# EAGLE board EIB36-JAE_MC-Av1_panelization (EAGLE 9.2.2)
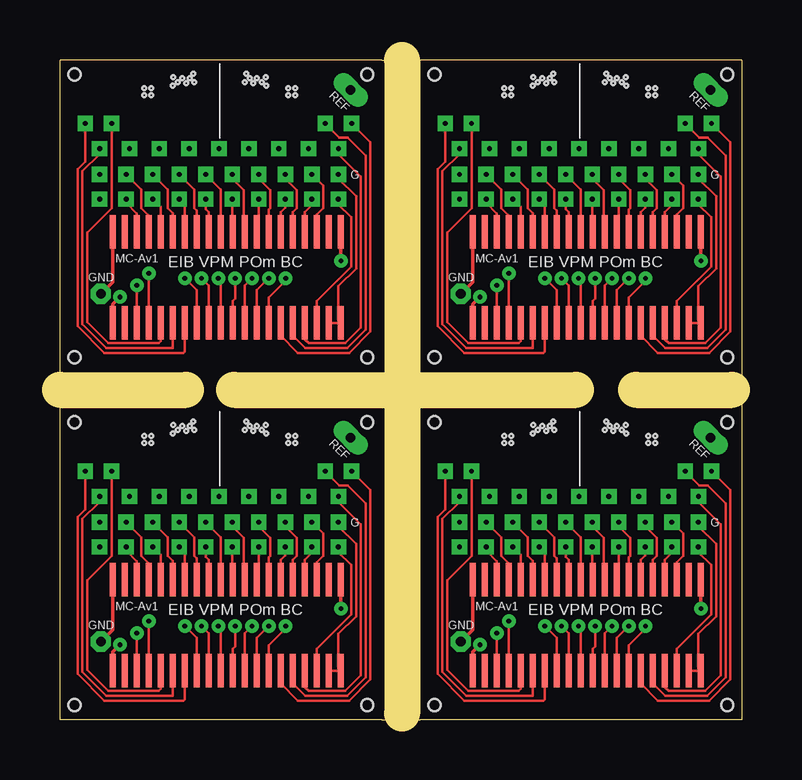
[diagram p0: board, top side]
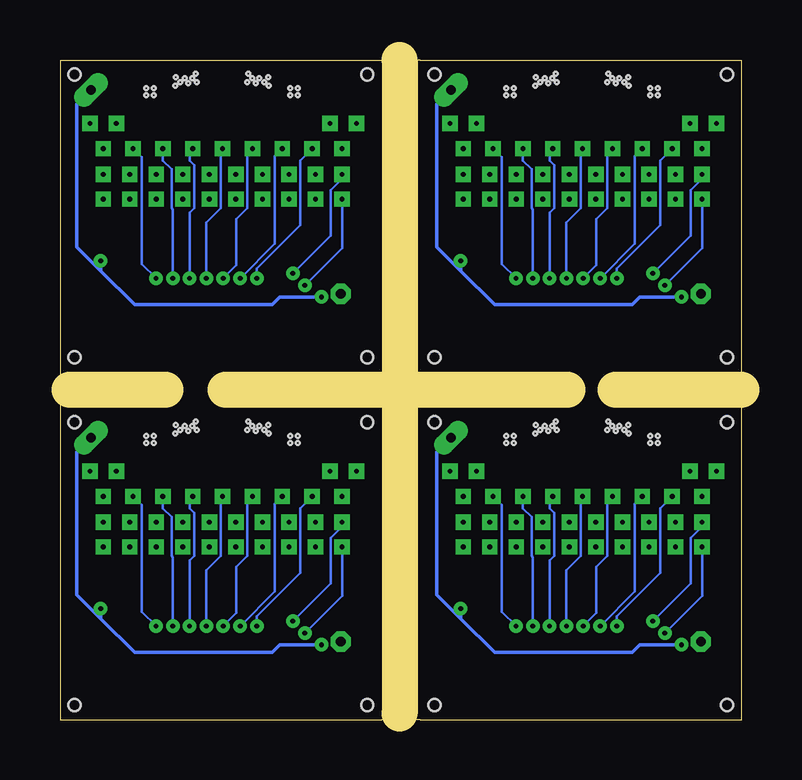
[diagram p1: board, bottom side, seen from below]

Size 28.4 x 27.5 mm. Coordinates in mm from the lower left corner, seen from the top.
Outline: 0,0 0,13 0,14.5 0,27.5 13.4,27.5 15,27.5 15.05,27.5 28.4,27.5 28.4,14.5 28.4,13 28.4,0 15,0 13.4,0 0,0
Copper layers (1*16): Top 0.035mm / dielectric 1mm / Bottom 0.035mm
Design rules "default *": minimum track width 0.1mm, minimum drill 0.15mm, track to track 0.1mm, track to pad 0.1mm, pad to pad 0.1mm, via to via 0.1mm, smd to smd 0.1mm, copper to edge 0.15mm, drill to drill 0.1mm, minimum pad ring 0.22mm, minimum via ring 0.18mm, stop-mask expansion 4mil, vias tented up to drill 0mil, thermal gap 5mil
Holes 0.5 mm at 12.8,12.4 0.6,0.6 12.8,0.6 0.6,12.4 12.8,26.9 0.6,15.1 12.8,15.1 0.6,26.9 27.8,26.9 15.6,15.1 27.8,15.1 15.6,26.9 27.8,12.4 15.6,0.6 27.8,0.6 15.6,12.4
Holes 0.15 mm at 4.7,11.93 5.25,12.03 4.9,12.08 5.1,12.23 3.5,11.53 3.8,11.53 3.5,11.83 3.8,11.83 9.8,11.53 9.5,11.53 9.8,11.83 9.5,11.83 4.72,12.28 5.6,12.07 5.4,12.23 5.55,12.43 8.6,11.93 8.05,12.03 8.4,12.08 8.2,12.23 8.57,12.28 7.7,12.07 7.9,12.23 7.75,12.43 4.7,26.43 5.25,26.53 4.9,26.58 5.1,26.73 3.5,26.03 3.8,26.03 3.5,26.33 3.8,26.33 9.8,26.03 9.5,26.03 9.8,26.33 9.5,26.33 4.72,26.77 5.6,26.57 5.4,26.73 5.55,26.93 8.6,26.43 8.05,26.53 8.4,26.58 8.2,26.73 8.57,26.77 7.7,26.57 7.9,26.73 7.75,26.93 19.7,26.43 20.25,26.53 19.9,26.58 20.1,26.73 18.5,26.03 18.8,26.03 18.5,26.33 18.8,26.33 24.8,26.03 24.5,26.03 24.8,26.33 24.5,26.33 19.73,26.77 20.6,26.57 20.4,26.73 20.55,26.93 23.6,26.43 23.05,26.53 23.4,26.58 23.2,26.73 23.57,26.77 22.7,26.57 22.9,26.73 22.75,26.93 19.7,11.93 20.25,12.03 19.9,12.08 20.1,12.23 18.5,11.53 18.8,11.53 18.5,11.83 18.8,11.83 24.8,11.53 24.5,11.53 24.8,11.83 24.5,11.83 19.73,12.28 20.6,12.07 20.4,12.23 20.55,12.43 23.6,11.93 23.05,12.03 23.4,12.08 23.2,12.23 23.57,12.28 22.7,12.07 22.9,12.23 22.75,12.43
Milling: 4 lines

## Footprints (pad centres in the part's own frame; a part is rotated, then mirrored left to right if it is on the bottom)
WR-40SB-VFH30 = smd 0.25 x 1.4: A1 0,0; A2 0.5,0; A3 1,0; A4 1.5,0; A5 2,0; A6 2.5,0; A7 3,0; A8 3.5,0; A9 4,0; A10 4.5,0; A11 5,0; A12 5.5,0; A13 6,0; A14 6.5,0; A15 7,0; A16 7.5,0; A17 8,0; A18 8.5,0; A19 9,0; A20 9.5,0; A21 0,-3.8; A22 0.5,-3.8; A23 1,-3.8; A24 1.5,-3.8; A25 2,-3.8; A26 2.5,-3.8; A27 3,-3.8; A28 3.5,-3.8; A29 4,-3.8; A30 4.5,-3.8; A31 5,-3.8; A32 5.5,-3.8; A33 6,-3.8; A34 6.5,-3.8; A35 7,-3.8; A36 7.5,-3.8; A37 8,-3.8; A38 8.5,-3.8; A39 9,-3.8; A40 9.5,-3.8
EIB-GND-HOLE-PAD-SMALL = drill 0.4 pad 0.41 long: P$1 0,0
EIB-GND-HOLE-PAD = drill 0.4 pad 0.8 octagon: P$1 0,0
EIB-TETRODE-HOLE-PAD = drill 0.2 pad 0.34 square: P$1 0,0

## Placement (x,y rotation side)
U$1  WR-40SB-VFH30  [WR-40SB-VFH30]  2.2,5.84 0 top
U$2  EIB-GND-HOLE-PAD-SMALL  [EIB-GND-HOLE-PAD-SMALL]  12.11,11.75 315 top
U$3  EIB-GND-HOLE-PAD  [EIB-GND-HOLE-PAD]  1.7,3.25 0 top
U$4  WR-40SB-VFH30  [WR-40SB-VFH30]  2.2,20.34 0 top
U$5  EIB-TETRODE-HOLE-PAD  [EIB-TETRODE-HOLE-PAD]  10.49,8.22 180 top
U$6  EIB-TETRODE-HOLE-PAD  [EIB-TETRODE-HOLE-PAD]  10.49,7.2 180 top
U$7  EIB-TETRODE-HOLE-PAD  [EIB-TETRODE-HOLE-PAD]  9.39,8.22 180 top
U$8  EIB-TETRODE-HOLE-PAD  [EIB-TETRODE-HOLE-PAD]  9.39,7.2 180 top
U$9  EIB-TETRODE-HOLE-PAD  [EIB-TETRODE-HOLE-PAD]  8.28,8.22 180 top
U$10  EIB-TETRODE-HOLE-PAD  [EIB-TETRODE-HOLE-PAD]  8.28,7.2 90 top
U$11  EIB-TETRODE-HOLE-PAD  [EIB-TETRODE-HOLE-PAD]  7.18,8.22 90 top
U$12  EIB-TETRODE-HOLE-PAD  [EIB-TETRODE-HOLE-PAD]  7.18,7.2 90 top
U$13  EIB-TETRODE-HOLE-PAD  [EIB-TETRODE-HOLE-PAD]  6.07,8.22 90 top
U$14  EIB-TETRODE-HOLE-PAD  [EIB-TETRODE-HOLE-PAD]  6.07,7.2 90 top
U$15  EIB-TETRODE-HOLE-PAD  [EIB-TETRODE-HOLE-PAD]  4.97,8.22 90 top
U$16  EIB-TETRODE-HOLE-PAD  [EIB-TETRODE-HOLE-PAD]  4.97,7.2 180 top
U$17  EIB-TETRODE-HOLE-PAD  [EIB-TETRODE-HOLE-PAD]  3.86,8.22 180 top
U$18  EIB-TETRODE-HOLE-PAD  [EIB-TETRODE-HOLE-PAD]  3.86,7.2 180 top
U$19  EIB-TETRODE-HOLE-PAD  [EIB-TETRODE-HOLE-PAD]  2.76,8.22 180 top
U$20  EIB-TETRODE-HOLE-PAD  [EIB-TETRODE-HOLE-PAD]  2.76,7.2 180 top
U$21  EIB-TETRODE-HOLE-PAD  [EIB-TETRODE-HOLE-PAD]  10.49,22.73 180 top
U$22  EIB-TETRODE-HOLE-PAD  [EIB-TETRODE-HOLE-PAD]  11.6,8.22 90 top
U$23  EIB-TETRODE-HOLE-PAD  [EIB-TETRODE-HOLE-PAD]  11.6,7.2 90 top
U$24  EIB-TETRODE-HOLE-PAD  [EIB-TETRODE-HOLE-PAD]  11.6,9.3 90 top
U$25  EIB-TETRODE-HOLE-PAD  [EIB-TETRODE-HOLE-PAD]  11.05,10.35 90 top
U$26  EIB-TETRODE-HOLE-PAD  [EIB-TETRODE-HOLE-PAD]  12.15,10.35 90 top
U$27  EIB-TETRODE-HOLE-PAD  [EIB-TETRODE-HOLE-PAD]  10.36,9.3 270 top
U$28  EIB-TETRODE-HOLE-PAD  [EIB-TETRODE-HOLE-PAD]  9.11,9.3 270 top
U$29  EIB-TETRODE-HOLE-PAD  [EIB-TETRODE-HOLE-PAD]  7.87,9.3 270 top
U$30  EIB-TETRODE-HOLE-PAD  [EIB-TETRODE-HOLE-PAD]  6.62,9.3 270 top
U$31  EIB-TETRODE-HOLE-PAD  [EIB-TETRODE-HOLE-PAD]  5.38,9.3 90 top
U$32  EIB-TETRODE-HOLE-PAD  [EIB-TETRODE-HOLE-PAD]  4.14,9.3 90 top
U$33  EIB-TETRODE-HOLE-PAD  [EIB-TETRODE-HOLE-PAD]  2.89,9.3 90 top
U$34  EIB-TETRODE-HOLE-PAD  [EIB-TETRODE-HOLE-PAD]  1.05,10.35 180 top
U$35  EIB-TETRODE-HOLE-PAD  [EIB-TETRODE-HOLE-PAD]  1.65,9.3 0 top
U$36  EIB-TETRODE-HOLE-PAD  [EIB-TETRODE-HOLE-PAD]  2.15,10.35 180 top
U$37  EIB-TETRODE-HOLE-PAD  [EIB-TETRODE-HOLE-PAD]  1.65,8.22 180 top
U$38  EIB-TETRODE-HOLE-PAD  [EIB-TETRODE-HOLE-PAD]  1.65,7.2 180 top
U$39  EIB-TETRODE-HOLE-PAD  [EIB-TETRODE-HOLE-PAD]  10.49,21.7 180 top
U$40  EIB-TETRODE-HOLE-PAD  [EIB-TETRODE-HOLE-PAD]  9.39,22.73 180 top
U$41  EIB-TETRODE-HOLE-PAD  [EIB-TETRODE-HOLE-PAD]  9.39,21.7 180 top
U$42  EIB-TETRODE-HOLE-PAD  [EIB-TETRODE-HOLE-PAD]  8.28,22.73 180 top
U$43  EIB-TETRODE-HOLE-PAD  [EIB-TETRODE-HOLE-PAD]  8.28,21.7 90 top
U$44  EIB-TETRODE-HOLE-PAD  [EIB-TETRODE-HOLE-PAD]  7.18,22.73 90 top
U$45  EIB-TETRODE-HOLE-PAD  [EIB-TETRODE-HOLE-PAD]  7.18,21.7 90 top
U$46  EIB-TETRODE-HOLE-PAD  [EIB-TETRODE-HOLE-PAD]  6.07,22.73 90 top
U$47  EIB-TETRODE-HOLE-PAD  [EIB-TETRODE-HOLE-PAD]  6.07,21.7 90 top
U$48  EIB-TETRODE-HOLE-PAD  [EIB-TETRODE-HOLE-PAD]  4.97,22.73 90 top
U$49  EIB-TETRODE-HOLE-PAD  [EIB-TETRODE-HOLE-PAD]  4.97,21.7 180 top
U$50  EIB-TETRODE-HOLE-PAD  [EIB-TETRODE-HOLE-PAD]  3.86,22.73 180 top
U$51  EIB-TETRODE-HOLE-PAD  [EIB-TETRODE-HOLE-PAD]  3.86,21.7 180 top
U$52  EIB-TETRODE-HOLE-PAD  [EIB-TETRODE-HOLE-PAD]  2.76,22.73 180 top
U$53  EIB-TETRODE-HOLE-PAD  [EIB-TETRODE-HOLE-PAD]  2.76,21.7 180 top
U$54  EIB-TETRODE-HOLE-PAD  [EIB-TETRODE-HOLE-PAD]  11.6,22.73 90 top
U$55  EIB-TETRODE-HOLE-PAD  [EIB-TETRODE-HOLE-PAD]  11.6,21.7 90 top
U$56  EIB-TETRODE-HOLE-PAD  [EIB-TETRODE-HOLE-PAD]  11.6,23.8 90 top
U$57  EIB-TETRODE-HOLE-PAD  [EIB-TETRODE-HOLE-PAD]  11.05,24.85 90 top
U$58  EIB-TETRODE-HOLE-PAD  [EIB-TETRODE-HOLE-PAD]  12.15,24.85 90 top
U$59  EIB-TETRODE-HOLE-PAD  [EIB-TETRODE-HOLE-PAD]  10.36,23.8 270 top
U$60  EIB-TETRODE-HOLE-PAD  [EIB-TETRODE-HOLE-PAD]  9.11,23.8 270 top
U$61  EIB-TETRODE-HOLE-PAD  [EIB-TETRODE-HOLE-PAD]  7.87,23.8 270 top
U$62  EIB-TETRODE-HOLE-PAD  [EIB-TETRODE-HOLE-PAD]  6.62,23.8 270 top
U$63  EIB-TETRODE-HOLE-PAD  [EIB-TETRODE-HOLE-PAD]  5.38,23.8 90 top
U$64  EIB-TETRODE-HOLE-PAD  [EIB-TETRODE-HOLE-PAD]  4.14,23.8 90 top
U$65  EIB-TETRODE-HOLE-PAD  [EIB-TETRODE-HOLE-PAD]  2.89,23.8 90 top
U$66  EIB-TETRODE-HOLE-PAD  [EIB-TETRODE-HOLE-PAD]  1.05,24.85 180 top
U$67  EIB-TETRODE-HOLE-PAD  [EIB-TETRODE-HOLE-PAD]  1.65,23.8 0 top
U$68  EIB-TETRODE-HOLE-PAD  [EIB-TETRODE-HOLE-PAD]  2.15,24.85 180 top
U$69  EIB-TETRODE-HOLE-PAD  [EIB-TETRODE-HOLE-PAD]  1.65,22.73 180 top
U$70  EIB-TETRODE-HOLE-PAD  [EIB-TETRODE-HOLE-PAD]  1.65,21.7 180 top
U$71  EIB-GND-HOLE-PAD-SMALL  [EIB-GND-HOLE-PAD-SMALL]  12.11,26.25 315 top
U$72  EIB-GND-HOLE-PAD  [EIB-GND-HOLE-PAD]  1.7,17.75 0 top
U$73  WR-40SB-VFH30  [WR-40SB-VFH30]  17.2,20.34 0 top
U$74  EIB-TETRODE-HOLE-PAD  [EIB-TETRODE-HOLE-PAD]  25.49,22.73 180 top
U$75  EIB-TETRODE-HOLE-PAD  [EIB-TETRODE-HOLE-PAD]  25.49,21.7 180 top
U$76  EIB-TETRODE-HOLE-PAD  [EIB-TETRODE-HOLE-PAD]  24.39,22.73 180 top
U$77  EIB-TETRODE-HOLE-PAD  [EIB-TETRODE-HOLE-PAD]  24.39,21.7 180 top
U$78  EIB-TETRODE-HOLE-PAD  [EIB-TETRODE-HOLE-PAD]  23.28,22.73 180 top
U$79  EIB-TETRODE-HOLE-PAD  [EIB-TETRODE-HOLE-PAD]  23.28,21.7 90 top
U$80  EIB-TETRODE-HOLE-PAD  [EIB-TETRODE-HOLE-PAD]  22.18,22.73 90 top
U$81  EIB-TETRODE-HOLE-PAD  [EIB-TETRODE-HOLE-PAD]  22.18,21.7 90 top
U$82  EIB-TETRODE-HOLE-PAD  [EIB-TETRODE-HOLE-PAD]  21.07,22.73 90 top
U$83  EIB-TETRODE-HOLE-PAD  [EIB-TETRODE-HOLE-PAD]  21.07,21.7 90 top
U$84  EIB-TETRODE-HOLE-PAD  [EIB-TETRODE-HOLE-PAD]  19.97,22.73 90 top
U$85  EIB-TETRODE-HOLE-PAD  [EIB-TETRODE-HOLE-PAD]  19.97,21.7 180 top
U$86  EIB-TETRODE-HOLE-PAD  [EIB-TETRODE-HOLE-PAD]  18.86,22.73 180 top
U$87  EIB-TETRODE-HOLE-PAD  [EIB-TETRODE-HOLE-PAD]  18.86,21.7 180 top
U$88  EIB-TETRODE-HOLE-PAD  [EIB-TETRODE-HOLE-PAD]  17.76,22.73 180 top
U$89  EIB-TETRODE-HOLE-PAD  [EIB-TETRODE-HOLE-PAD]  17.76,21.7 180 top
U$90  EIB-TETRODE-HOLE-PAD  [EIB-TETRODE-HOLE-PAD]  26.6,22.73 90 top
U$91  EIB-TETRODE-HOLE-PAD  [EIB-TETRODE-HOLE-PAD]  26.6,21.7 90 top
U$92  EIB-TETRODE-HOLE-PAD  [EIB-TETRODE-HOLE-PAD]  26.6,23.8 90 top
U$93  EIB-TETRODE-HOLE-PAD  [EIB-TETRODE-HOLE-PAD]  26.05,24.85 90 top
U$94  EIB-TETRODE-HOLE-PAD  [EIB-TETRODE-HOLE-PAD]  27.15,24.85 90 top
U$95  EIB-TETRODE-HOLE-PAD  [EIB-TETRODE-HOLE-PAD]  25.36,23.8 270 top
U$96  EIB-TETRODE-HOLE-PAD  [EIB-TETRODE-HOLE-PAD]  24.11,23.8 270 top
U$97  EIB-TETRODE-HOLE-PAD  [EIB-TETRODE-HOLE-PAD]  22.87,23.8 270 top
U$98  EIB-TETRODE-HOLE-PAD  [EIB-TETRODE-HOLE-PAD]  21.62,23.8 270 top
U$99  EIB-TETRODE-HOLE-PAD  [EIB-TETRODE-HOLE-PAD]  20.38,23.8 90 top
U$100  EIB-TETRODE-HOLE-PAD  [EIB-TETRODE-HOLE-PAD]  19.14,23.8 90 top
U$101  EIB-TETRODE-HOLE-PAD  [EIB-TETRODE-HOLE-PAD]  17.89,23.8 90 top
U$102  EIB-TETRODE-HOLE-PAD  [EIB-TETRODE-HOLE-PAD]  16.05,24.85 180 top
U$103  EIB-TETRODE-HOLE-PAD  [EIB-TETRODE-HOLE-PAD]  16.65,23.8 0 top
U$104  EIB-TETRODE-HOLE-PAD  [EIB-TETRODE-HOLE-PAD]  17.15,24.85 180 top
U$105  EIB-TETRODE-HOLE-PAD  [EIB-TETRODE-HOLE-PAD]  16.65,22.73 180 top
U$106  EIB-TETRODE-HOLE-PAD  [EIB-TETRODE-HOLE-PAD]  16.65,21.7 180 top
U$107  EIB-GND-HOLE-PAD-SMALL  [EIB-GND-HOLE-PAD-SMALL]  27.11,26.25 315 top
U$108  EIB-GND-HOLE-PAD  [EIB-GND-HOLE-PAD]  16.7,17.75 0 top
U$109  WR-40SB-VFH30  [WR-40SB-VFH30]  17.2,5.84 0 top
U$110  EIB-TETRODE-HOLE-PAD  [EIB-TETRODE-HOLE-PAD]  25.49,8.22 180 top
U$111  EIB-TETRODE-HOLE-PAD  [EIB-TETRODE-HOLE-PAD]  25.49,7.2 180 top
U$112  EIB-TETRODE-HOLE-PAD  [EIB-TETRODE-HOLE-PAD]  24.39,8.22 180 top
U$113  EIB-TETRODE-HOLE-PAD  [EIB-TETRODE-HOLE-PAD]  24.39,7.2 180 top
U$114  EIB-TETRODE-HOLE-PAD  [EIB-TETRODE-HOLE-PAD]  23.28,8.22 180 top
U$115  EIB-TETRODE-HOLE-PAD  [EIB-TETRODE-HOLE-PAD]  23.28,7.2 90 top
U$116  EIB-TETRODE-HOLE-PAD  [EIB-TETRODE-HOLE-PAD]  22.18,8.22 90 top
U$117  EIB-TETRODE-HOLE-PAD  [EIB-TETRODE-HOLE-PAD]  22.18,7.2 90 top
U$118  EIB-TETRODE-HOLE-PAD  [EIB-TETRODE-HOLE-PAD]  21.07,8.22 90 top
U$119  EIB-TETRODE-HOLE-PAD  [EIB-TETRODE-HOLE-PAD]  21.07,7.2 90 top
U$120  EIB-TETRODE-HOLE-PAD  [EIB-TETRODE-HOLE-PAD]  19.97,8.22 90 top
U$121  EIB-TETRODE-HOLE-PAD  [EIB-TETRODE-HOLE-PAD]  19.97,7.2 180 top
U$122  EIB-TETRODE-HOLE-PAD  [EIB-TETRODE-HOLE-PAD]  18.86,8.22 180 top
U$123  EIB-TETRODE-HOLE-PAD  [EIB-TETRODE-HOLE-PAD]  18.86,7.2 180 top
U$124  EIB-TETRODE-HOLE-PAD  [EIB-TETRODE-HOLE-PAD]  17.76,8.22 180 top
U$125  EIB-TETRODE-HOLE-PAD  [EIB-TETRODE-HOLE-PAD]  17.76,7.2 180 top
U$126  EIB-TETRODE-HOLE-PAD  [EIB-TETRODE-HOLE-PAD]  26.6,8.22 90 top
U$127  EIB-TETRODE-HOLE-PAD  [EIB-TETRODE-HOLE-PAD]  26.6,7.2 90 top
U$128  EIB-TETRODE-HOLE-PAD  [EIB-TETRODE-HOLE-PAD]  26.6,9.3 90 top
U$129  EIB-TETRODE-HOLE-PAD  [EIB-TETRODE-HOLE-PAD]  26.05,10.35 90 top
U$130  EIB-TETRODE-HOLE-PAD  [EIB-TETRODE-HOLE-PAD]  27.15,10.35 90 top
U$131  EIB-TETRODE-HOLE-PAD  [EIB-TETRODE-HOLE-PAD]  25.36,9.3 270 top
U$132  EIB-TETRODE-HOLE-PAD  [EIB-TETRODE-HOLE-PAD]  24.11,9.3 270 top
U$133  EIB-TETRODE-HOLE-PAD  [EIB-TETRODE-HOLE-PAD]  22.87,9.3 270 top
U$134  EIB-TETRODE-HOLE-PAD  [EIB-TETRODE-HOLE-PAD]  21.62,9.3 270 top
U$135  EIB-TETRODE-HOLE-PAD  [EIB-TETRODE-HOLE-PAD]  20.38,9.3 90 top
U$136  EIB-TETRODE-HOLE-PAD  [EIB-TETRODE-HOLE-PAD]  19.14,9.3 90 top
U$137  EIB-TETRODE-HOLE-PAD  [EIB-TETRODE-HOLE-PAD]  17.89,9.3 90 top
U$138  EIB-TETRODE-HOLE-PAD  [EIB-TETRODE-HOLE-PAD]  16.05,10.35 180 top
U$139  EIB-TETRODE-HOLE-PAD  [EIB-TETRODE-HOLE-PAD]  16.65,9.3 0 top
U$140  EIB-TETRODE-HOLE-PAD  [EIB-TETRODE-HOLE-PAD]  17.15,10.35 180 top
U$141  EIB-TETRODE-HOLE-PAD  [EIB-TETRODE-HOLE-PAD]  16.65,8.22 180 top
U$142  EIB-TETRODE-HOLE-PAD  [EIB-TETRODE-HOLE-PAD]  16.65,7.2 180 top
U$143  EIB-GND-HOLE-PAD-SMALL  [EIB-GND-HOLE-PAD-SMALL]  27.11,11.75 315 top
U$144  EIB-GND-HOLE-PAD  [EIB-GND-HOLE-PAD]  16.7,3.25 0 top

## Library data of the parts
U$1-U$144 = EIBLibrary

## Nets
N$1: U$1.A20 U$1.A21 U$2.P$1
N$2: U$1.A1 U$3.P$1
N$3: U$4.A20 U$4.A21 U$71.P$1
N$4: U$4.A18 U$21.P$1
N$5: U$4.A17 U$39.P$1
N$6: U$1.A18 U$5.P$1
N$7: U$1.A17 U$6.P$1
N$8: U$1.A16 U$7.P$1
N$9: U$1.A15 U$8.P$1
N$10: U$1.A14 U$9.P$1
N$11: U$1.A13 U$10.P$1
N$12: U$1.A12 U$11.P$1
N$13: U$1.A11 U$12.P$1
N$14: U$1.A10 U$13.P$1
N$15: U$1.A9 U$14.P$1
N$16: U$1.A8 U$15.P$1
N$17: U$1.A7 U$16.P$1
N$18: U$1.A6 U$17.P$1
N$19: U$1.A5 U$18.P$1
N$20: U$1.A4 U$19.P$1
N$21: U$1.A3 U$20.P$1
N$22: U$4.A16 U$40.P$1
N$23: U$1.A39 U$1.A40 U$22.P$1
N$24: U$1.A38 U$23.P$1
N$25: U$1.A37 U$24.P$1
N$26: U$1.A36 U$25.P$1
N$27: U$1.A35 U$26.P$1
N$28: U$1.A34 U$27.P$1
N$29: U$1.A33 U$28.P$1
N$30: U$1.A32 U$29.P$1
N$31: U$1.A31 U$30.P$1
N$32: U$1.A30 U$31.P$1
N$33: U$1.A29 U$32.P$1
N$34: U$1.A28 U$33.P$1
N$35: U$1.A27 U$34.P$1
N$36: U$1.A26 U$35.P$1
N$37: U$1.A25 U$36.P$1
N$38: U$1.A24 U$37.P$1
N$39: U$1.A23 U$38.P$1
N$40: U$4.A15 U$41.P$1
N$41: U$4.A14 U$42.P$1
N$42: U$4.A13 U$43.P$1
N$43: U$4.A12 U$44.P$1
N$44: U$4.A11 U$45.P$1
N$45: U$4.A10 U$46.P$1
N$46: U$4.A9 U$47.P$1
N$47: U$4.A8 U$48.P$1
N$48: U$4.A7 U$49.P$1
N$49: U$4.A6 U$50.P$1
N$50: U$4.A5 U$51.P$1
N$51: U$4.A4 U$52.P$1
N$52: U$4.A3 U$53.P$1
N$53: U$4.A39 U$4.A40 U$54.P$1
N$54: U$4.A38 U$55.P$1
N$55: U$4.A37 U$56.P$1
N$56: U$4.A36 U$57.P$1
N$57: U$4.A35 U$58.P$1
N$58: U$4.A34 U$59.P$1
N$59: U$4.A33 U$60.P$1
N$60: U$4.A32 U$61.P$1
N$61: U$4.A31 U$62.P$1
N$62: U$4.A30 U$63.P$1
N$63: U$4.A29 U$64.P$1
N$64: U$4.A28 U$65.P$1
N$65: U$4.A27 U$66.P$1
N$66: U$4.A26 U$67.P$1
N$67: U$4.A25 U$68.P$1
N$68: U$4.A24 U$69.P$1
N$69: U$4.A23 U$70.P$1
N$70: U$4.A1 U$72.P$1
N$71: U$73.A20 U$73.A21 U$107.P$1
N$72: U$73.A18 U$74.P$1
N$73: U$73.A17 U$75.P$1
N$74: U$73.A16 U$76.P$1
N$75: U$73.A15 U$77.P$1
N$76: U$73.A14 U$78.P$1
N$77: U$73.A13 U$79.P$1
N$78: U$73.A12 U$80.P$1
N$79: U$73.A11 U$81.P$1
N$80: U$73.A10 U$82.P$1
N$81: U$73.A9 U$83.P$1
N$82: U$73.A8 U$84.P$1
N$83: U$73.A7 U$85.P$1
N$84: U$73.A6 U$86.P$1
N$85: U$73.A5 U$87.P$1
N$86: U$73.A4 U$88.P$1
N$87: U$73.A3 U$89.P$1
N$88: U$73.A39 U$73.A40 U$90.P$1
N$89: U$73.A38 U$91.P$1
N$90: U$73.A37 U$92.P$1
N$91: U$73.A36 U$93.P$1
N$92: U$73.A35 U$94.P$1
N$93: U$73.A34 U$95.P$1
N$94: U$73.A33 U$96.P$1
N$95: U$73.A32 U$97.P$1
N$96: U$73.A31 U$98.P$1
N$97: U$73.A30 U$99.P$1
N$98: U$73.A29 U$100.P$1
N$99: U$73.A28 U$101.P$1
N$100: U$73.A27 U$102.P$1
N$101: U$73.A26 U$103.P$1
N$102: U$73.A25 U$104.P$1
N$103: U$73.A24 U$105.P$1
N$104: U$73.A23 U$106.P$1
N$105: U$73.A1 U$108.P$1
N$106: U$109.A20 U$109.A21 U$143.P$1
N$107: U$109.A18 U$110.P$1
N$108: U$109.A17 U$111.P$1
N$109: U$109.A16 U$112.P$1
N$110: U$109.A15 U$113.P$1
N$111: U$109.A14 U$114.P$1
N$112: U$109.A13 U$115.P$1
N$113: U$109.A12 U$116.P$1
N$114: U$109.A11 U$117.P$1
N$115: U$109.A10 U$118.P$1
N$116: U$109.A9 U$119.P$1
N$117: U$109.A8 U$120.P$1
N$118: U$109.A7 U$121.P$1
N$119: U$109.A6 U$122.P$1
N$120: U$109.A5 U$123.P$1
N$121: U$109.A4 U$124.P$1
N$122: U$109.A3 U$125.P$1
N$123: U$109.A39 U$109.A40 U$126.P$1
N$124: U$109.A38 U$127.P$1
N$125: U$109.A37 U$128.P$1
N$126: U$109.A36 U$129.P$1
N$127: U$109.A35 U$130.P$1
N$128: U$109.A34 U$131.P$1
N$129: U$109.A33 U$132.P$1
N$130: U$109.A32 U$133.P$1
N$131: U$109.A31 U$134.P$1
N$132: U$109.A30 U$135.P$1
N$133: U$109.A29 U$136.P$1
N$134: U$109.A28 U$137.P$1
N$135: U$109.A27 U$138.P$1
N$136: U$109.A26 U$139.P$1
N$137: U$109.A25 U$140.P$1
N$138: U$109.A24 U$141.P$1
N$139: U$109.A23 U$142.P$1
N$140: U$109.A1 U$144.P$1

## Tracks (layer width: path | path; a pad name or v marks a point on that pad's centre or on a via)
N$1  (via drill 0.2)
  Top 0.15: U$1.A21 2.2,2.82 v2.5,3.12 | U$1.A20 v11.7,4.63 v11.71,4.62
  Bottom 0.15: v2.5,3.12 4.24,3.12 4.56,2.79 10.29,2.79 11.71,4.21 | 11.71,4.21 v11.71,4.62 | 11.71,4.21 12.7,5.2 12.7,11.16 U$2.P$1
N$2
  Top 0.15: U$3.P$1 2.2,3.75 U$1.A1
N$3  (via drill 0.2)
  Top 0.15: U$4.A21 2.2,17.32 v2.5,17.62 | U$4.A20 v11.7,19.13 v11.71,19.12
  Bottom 0.15: v2.5,17.62 4.24,17.62 4.56,17.3 10.29,17.3 11.71,18.7 | 11.71,18.7 v11.71,19.12 | 11.71,18.7 12.7,19.7 12.7,25.66 U$71.P$1
N$4
  Top 0.1: U$4.A18 10.7,21.05 10.96,21.32 10.96,22.25 U$21.P$1
N$5
  Top 0.1: U$39.P$1 10.49,21.44 10.2,21.15 U$4.A17
N$6
  Top 0.1: U$1.A18 10.7,6.55 10.96,6.82 10.96,7.75 U$5.P$1
N$7
  Top 0.1: U$6.P$1 10.49,6.94 10.2,6.65 U$1.A17
N$8
  Top 0.1: U$7.P$1 9.39,8.05 9.86,7.58 9.86,6.82 9.7,6.66 U$1.A16
N$9
  Top 0.1: U$8.P$1 9.39,6.84 9.2,6.65 U$1.A15
N$10
  Top 0.1: U$9.P$1 8.28,8.05 8.75,7.58 8.75,6.82 8.7,6.76 U$1.A14
N$11
  Top 0.1: U$10.P$1 8.28,5.92 U$1.A13
N$12
  Top 0.1: U$11.P$1 7.18,8.05 7.65,7.58 7.65,5.89 U$1.A12
N$13
  Top 0.1: U$12.P$1 7.18,5.86 U$1.A11
N$14
  Top 0.1: U$13.P$1 6.7,7.6 U$1.A10
N$15
  Top 0.1: U$14.P$1 6.07,6.78 6.2,6.65 U$1.A9
N$16
  Top 0.1: U$15.P$1 5.6,7.59 5.6,6.82 5.7,6.72 U$1.A8
N$17
  Top 0.1: U$16.P$1 5.2,6.97 U$1.A7
N$18
  Top 0.1: U$17.P$1 4.5,7.59 4.5,6.82 4.7,6.62 U$1.A6
N$19
  Top 0.1: U$18.P$1 4.2,6.86 U$1.A5
N$20
  Top 0.1: U$1.A4 3.7,6.51 3.39,6.82 3.39,7.59 U$19.P$1
N$21
  Top 0.1: U$20.P$1 2.76,7.04 3.2,6.6 U$1.A3
N$22
  Top 0.1: U$40.P$1 9.39,22.55 9.86,22.08 9.86,21.32 9.7,21.16 U$4.A16
N$23
  Top 0.1: U$1.A39 U$1.A40 11.6,2.14 11.6,3.57 12.34,4.3 12.34,7.32 11.6,8.05 U$22.P$1
N$24
  Top 0.1: U$1.A38 10.7,2.95 12.13,4.38 12.13,6.44 11.6,6.98 U$23.P$1
N$25
  Top 0.1: U$24.P$1 11.6,9.08 12.54,8.14 12.54,1.84 11.89,1.19 10.36,1.19 10.2,1.35 U$1.A37
N$26
  Top 0.1: U$1.A36 9.7,1.5 10.21,0.99 11.97,0.99 12.73,1.75 12.73,9.02 11.98,9.77 11.63,9.77 U$25.P$1
N$27
  Top 0.1: U$1.A35 9.2,1.5 9.91,0.79 12.05,0.79 12.94,1.67 12.94,9.56 U$26.P$1
N$28  (via drill 0.2)
  Top 0.1: v9.4,3.9 9.4,3.8 8.7,3.1 U$1.A34
  Bottom 0.1: v9.4,3.9 10,4.5 10,8.94 U$27.P$1
N$29  (via drill 0.2)
  Top 0.1: v8.7,3.9 8.2,3.4 U$1.A33
  Bottom 0.1: v8.7,3.9 8.7,6.76 8.75,6.82 8.75,8.45 9.11,8.81 U$28.P$1
N$30  (via drill 0.2)
  Top 0.1: v8,3.9 7.7,3.6 U$1.A32
  Bottom 0.1: U$29.P$1 8,9.17 8,8.79 7.81,8.61 7.81,6.82 8,6.63 v8,3.9
N$31  (via drill 0.2)
  Top 0.1: v7.3,3.9 7.3,3.05 7.2,2.95 U$1.A31
  Bottom 0.1: v7.3,3.9 7.3,6.23 6.71,6.82 6.71,7.39 6.7,7.4 6.7,9.22 U$30.P$1
N$32  (via drill 0.2)
  Top 0.1: v6.6,3.9 6.7,3.8 U$1.A30
  Bottom 0.1: U$31.P$1 5.6,9.08 5.6,6.82 6.05,6.37 6.05,4.45 v6.6,3.9
N$33  (via drill 0.2 pad 0.55)
  Top 0.1: v5.89,3.89 6.2,3.58 U$1.A29
  Bottom 0.1: v5.89,3.89 4.45,5.33 4.45,8.99 U$32.P$1
N$34  (via drill 0.2 pad 0.55)
  Top 0.1: v5.2,3.9 5.7,3.4 U$1.A28
  Bottom 0.1: v5.2,3.9 5.2,4.3 3.39,6.11 3.39,8.8 U$33.P$1
N$35
  Top 0.1: U$34.P$1 1.05,8.76 0.73,8.44 0.73,1.91 1.85,0.79 5.14,0.79 5.2,0.85 U$1.A27
N$36
  Top 0.1: U$35.P$1 1.65,9.08 0.93,8.36 0.93,1.99 1.93,0.99 4.69,0.99 4.7,1 U$1.A26
N$37
  Top 0.1: U$1.A25 4.2,1.29 4.1,1.19 2.01,1.19 1.13,2.07 1.13,5.81 2.15,6.83 U$36.P$1
N$38  (via drill 0.2)
  Top 0.1: U$1.A24 v3.7,4.1
  Bottom 0.1: U$37.P$1 1.65,8.05 2.12,7.58 2.12,5.68 v3.7,4.1
N$39  (via drill 0.2)
  Top 0.1: U$1.A23 v3.2,3.6
  Bottom 0.1: v3.2,3.6 1.65,5.15 U$38.P$1
N$40
  Top 0.1: U$41.P$1 9.39,21.34 9.2,21.15 U$4.A15
N$41
  Top 0.1: U$42.P$1 8.28,22.55 8.75,22.08 8.75,21.32 8.7,21.27 U$4.A14
N$42
  Top 0.1: U$43.P$1 8.28,20.42 U$4.A13
N$43
  Top 0.1: U$44.P$1 7.18,22.55 7.65,22.08 7.65,20.39 U$4.A12
N$44
  Top 0.1: U$45.P$1 7.18,20.36 U$4.A11
N$45
  Top 0.1: U$46.P$1 6.7,22.1 U$4.A10
N$46
  Top 0.1: U$47.P$1 6.07,21.28 6.2,21.15 U$4.A9
N$47
  Top 0.1: U$48.P$1 5.6,22.09 5.6,21.32 5.7,21.22 U$4.A8
N$48
  Top 0.1: U$49.P$1 5.2,21.47 U$4.A7
N$49
  Top 0.1: U$50.P$1 4.5,22.09 4.5,21.32 4.7,21.11 U$4.A6
N$50
  Top 0.1: U$51.P$1 4.2,21.36 U$4.A5
N$51
  Top 0.1: U$4.A4 3.7,21.01 3.39,21.32 3.39,22.09 U$52.P$1
N$52
  Top 0.1: U$53.P$1 2.76,21.54 3.2,21.1 U$4.A3
N$53
  Top 0.1: U$4.A39 U$4.A40 11.6,16.64 11.6,18.07 12.34,18.8 12.34,21.82 11.6,22.55 U$54.P$1
N$54
  Top 0.1: U$4.A38 10.7,17.45 12.13,18.89 12.13,20.94 11.6,21.48 U$55.P$1
N$55
  Top 0.1: U$56.P$1 11.6,23.58 12.54,22.64 12.54,16.34 11.89,15.69 10.36,15.69 10.2,15.85 U$4.A37
N$56
  Top 0.1: U$4.A36 9.7,16 10.21,15.49 11.97,15.49 12.73,16.25 12.73,23.52 11.98,24.27 11.63,24.27 U$57.P$1
N$57
  Top 0.1: U$4.A35 9.2,16 9.91,15.29 12.05,15.29 12.94,16.17 12.94,24.07 U$58.P$1
N$58  (via drill 0.2)
  Top 0.1: v9.4,18.4 9.4,18.3 8.7,17.6 U$4.A34
  Bottom 0.1: v9.4,18.4 10,19 10,23.44 U$59.P$1
N$59  (via drill 0.2)
  Top 0.1: v8.7,18.4 8.2,17.9 U$4.A33
  Bottom 0.1: v8.7,18.4 8.7,21.27 8.75,21.32 8.75,22.95 9.11,23.31 U$60.P$1
N$60  (via drill 0.2)
  Top 0.1: v8,18.4 7.7,18.1 U$4.A32
  Bottom 0.1: U$61.P$1 8,23.67 8,23.29 7.81,23.11 7.81,21.32 8,21.13 v8,18.4
N$61  (via drill 0.2)
  Top 0.1: v7.3,18.4 7.3,17.55 7.2,17.45 U$4.A31
  Bottom 0.1: v7.3,18.4 7.3,20.73 6.71,21.32 6.71,21.89 6.7,21.9 6.7,23.73 U$62.P$1
N$62  (via drill 0.2)
  Top 0.1: v6.6,18.4 6.7,18.3 U$4.A30
  Bottom 0.1: U$63.P$1 5.6,23.58 5.6,21.32 6.05,20.87 6.05,18.95 v6.6,18.4
N$63  (via drill 0.2 pad 0.55)
  Top 0.1: v5.89,18.39 6.2,18.08 U$4.A29
  Bottom 0.1: v5.89,18.39 4.45,19.83 4.45,23.49 U$64.P$1
N$64  (via drill 0.2 pad 0.55)
  Top 0.1: v5.2,18.4 5.7,17.9 U$4.A28
  Bottom 0.1: v5.2,18.4 5.2,18.8 3.39,20.61 3.39,23.3 U$65.P$1
N$65
  Top 0.1: U$66.P$1 1.05,23.26 0.73,22.94 0.73,16.41 1.85,15.29 5.14,15.29 5.2,15.35 U$4.A27
N$66
  Top 0.1: U$67.P$1 1.65,23.58 0.93,22.86 0.93,16.49 1.93,15.49 4.69,15.49 4.7,15.5 U$4.A26
N$67
  Top 0.1: U$4.A25 4.2,15.79 4.1,15.69 2.01,15.69 1.13,16.57 1.13,20.31 2.15,21.33 U$68.P$1
N$68  (via drill 0.2)
  Top 0.1: U$4.A24 v3.7,18.6
  Bottom 0.1: U$69.P$1 1.65,22.55 2.12,22.08 2.12,20.18 v3.7,18.6
N$69  (via drill 0.2)
  Top 0.1: U$4.A23 v3.2,18.1
  Bottom 0.1: v3.2,18.1 1.65,19.65 U$70.P$1
N$70
  Top 0.15: U$72.P$1 2.2,18.25 U$4.A1
N$71  (via drill 0.2)
  Top 0.15: U$73.A21 17.2,17.32 v17.5,17.62 | U$73.A20 v26.7,19.13 v26.7,19.12
  Bottom 0.15: v17.5,17.62 19.24,17.62 19.56,17.3 25.3,17.3 26.7,18.7 | 26.7,18.7 v26.7,19.12 | 26.7,18.7 27.7,19.7 27.7,25.66 U$107.P$1
N$72
  Top 0.1: U$73.A18 25.7,21.05 25.96,21.32 25.96,22.25 U$74.P$1
N$73
  Top 0.1: U$75.P$1 25.49,21.44 25.2,21.15 U$73.A17
N$74
  Top 0.1: U$76.P$1 24.39,22.55 24.86,22.08 24.86,21.32 24.7,21.16 U$73.A16
N$75
  Top 0.1: U$77.P$1 24.39,21.34 24.2,21.15 U$73.A15
N$76
  Top 0.1: U$78.P$1 23.28,22.55 23.75,22.08 23.75,21.32 23.7,21.27 U$73.A14
N$77
  Top 0.1: U$79.P$1 23.28,20.42 U$73.A13
N$78
  Top 0.1: U$80.P$1 22.18,22.55 22.65,22.08 22.65,20.39 U$73.A12
N$79
  Top 0.1: U$81.P$1 22.18,20.36 U$73.A11
N$80
  Top 0.1: U$82.P$1 21.7,22.1 U$73.A10
N$81
  Top 0.1: U$83.P$1 21.07,21.28 21.2,21.15 U$73.A9
N$82
  Top 0.1: U$84.P$1 20.6,22.09 20.6,21.32 20.7,21.22 U$73.A8
N$83
  Top 0.1: U$85.P$1 20.2,21.47 U$73.A7
N$84
  Top 0.1: U$86.P$1 19.5,22.09 19.5,21.32 19.7,21.11 U$73.A6
N$85
  Top 0.1: U$87.P$1 19.2,21.36 U$73.A5
N$86
  Top 0.1: U$73.A4 18.7,21.01 18.39,21.32 18.39,22.09 U$88.P$1
N$87
  Top 0.1: U$89.P$1 17.76,21.54 18.2,21.1 U$73.A3
N$88
  Top 0.1: U$73.A39 U$73.A40 26.6,16.64 26.6,18.07 27.34,18.8 27.34,21.82 26.6,22.55 U$90.P$1
N$89
  Top 0.1: U$73.A38 25.7,17.45 27.14,18.89 27.14,20.94 26.6,21.48 U$91.P$1
N$90
  Top 0.1: U$92.P$1 26.6,23.58 27.54,22.64 27.54,16.34 26.89,15.69 25.36,15.69 25.2,15.85 U$73.A37
N$91
  Top 0.1: U$73.A36 24.7,16 25.21,15.49 26.97,15.49 27.73,16.25 27.73,23.52 26.98,24.27 26.63,24.27 U$93.P$1
N$92
  Top 0.1: U$73.A35 24.2,16 24.91,15.29 27.05,15.29 27.93,16.17 27.93,24.07 U$94.P$1
N$93  (via drill 0.2)
  Top 0.1: v24.4,18.4 24.4,18.3 23.7,17.6 U$73.A34
  Bottom 0.1: v24.4,18.4 25,19 25,23.44 U$95.P$1
N$94  (via drill 0.2)
  Top 0.1: v23.7,18.4 23.2,17.9 U$73.A33
  Bottom 0.1: v23.7,18.4 23.7,21.27 23.75,21.32 23.75,22.95 24.11,23.31 U$96.P$1
N$95  (via drill 0.2)
  Top 0.1: v23,18.4 22.7,18.1 U$73.A32
  Bottom 0.1: U$97.P$1 23,23.67 23,23.29 22.81,23.11 22.81,21.32 23,21.13 v23,18.4
N$96  (via drill 0.2)
  Top 0.1: v22.3,18.4 22.3,17.55 22.2,17.45 U$73.A31
  Bottom 0.1: v22.3,18.4 22.3,20.73 21.71,21.32 21.71,21.89 21.7,21.9 21.7,23.73 U$98.P$1
N$97  (via drill 0.2)
  Top 0.1: v21.6,18.4 21.7,18.3 U$73.A30
  Bottom 0.1: U$99.P$1 20.6,23.58 20.6,21.32 21.05,20.87 21.05,18.95 v21.6,18.4
N$98  (via drill 0.2 pad 0.55)
  Top 0.1: v20.89,18.39 21.2,18.08 U$73.A29
  Bottom 0.1: v20.89,18.39 19.45,19.83 19.45,23.49 U$100.P$1
N$99  (via drill 0.2 pad 0.55)
  Top 0.1: v20.2,18.4 20.7,17.9 U$73.A28
  Bottom 0.1: v20.2,18.4 20.2,18.8 18.39,20.61 18.39,23.3 U$101.P$1
N$100
  Top 0.1: U$102.P$1 16.05,23.26 15.73,22.94 15.73,16.41 16.85,15.29 20.14,15.29 20.2,15.35 U$73.A27
N$101
  Top 0.1: U$103.P$1 16.65,23.58 15.93,22.86 15.93,16.49 16.93,15.49 19.69,15.49 19.7,15.5 U$73.A26
N$102
  Top 0.1: U$73.A25 19.2,15.79 19.1,15.69 17.01,15.69 16.13,16.57 16.13,20.31 17.15,21.33 U$104.P$1
N$103  (via drill 0.2)
  Top 0.1: U$73.A24 v18.7,18.6
  Bottom 0.1: U$105.P$1 16.65,22.55 17.12,22.08 17.12,20.18 v18.7,18.6
N$104  (via drill 0.2)
  Top 0.1: U$73.A23 v18.2,18.1
  Bottom 0.1: v18.2,18.1 16.65,19.65 U$106.P$1
N$105
  Top 0.15: U$108.P$1 17.2,18.25 U$73.A1
N$106  (via drill 0.2)
  Top 0.15: U$109.A21 17.2,2.82 v17.5,3.12 | U$109.A20 v26.7,4.63 v26.7,4.62
  Bottom 0.15: v17.5,3.12 19.24,3.12 19.56,2.79 25.3,2.79 26.7,4.21 | 26.7,4.21 v26.7,4.62 | 26.7,4.21 27.7,5.2 27.7,11.16 U$143.P$1
N$107
  Top 0.1: U$109.A18 25.7,6.55 25.96,6.82 25.96,7.75 U$110.P$1
N$108
  Top 0.1: U$111.P$1 25.49,6.94 25.2,6.65 U$109.A17
N$109
  Top 0.1: U$112.P$1 24.39,8.05 24.86,7.58 24.86,6.82 24.7,6.66 U$109.A16
N$110
  Top 0.1: U$113.P$1 24.39,6.84 24.2,6.65 U$109.A15
N$111
  Top 0.1: U$114.P$1 23.28,8.05 23.75,7.58 23.75,6.82 23.7,6.76 U$109.A14
N$112
  Top 0.1: U$115.P$1 23.28,5.92 U$109.A13
N$113
  Top 0.1: U$116.P$1 22.18,8.05 22.65,7.58 22.65,5.89 U$109.A12
N$114
  Top 0.1: U$117.P$1 22.18,5.86 U$109.A11
N$115
  Top 0.1: U$118.P$1 21.7,7.6 U$109.A10
N$116
  Top 0.1: U$119.P$1 21.07,6.78 21.2,6.65 U$109.A9
N$117
  Top 0.1: U$120.P$1 20.6,7.59 20.6,6.82 20.7,6.72 U$109.A8
N$118
  Top 0.1: U$121.P$1 20.2,6.97 U$109.A7
N$119
  Top 0.1: U$122.P$1 19.5,7.59 19.5,6.82 19.7,6.62 U$109.A6
N$120
  Top 0.1: U$123.P$1 19.2,6.86 U$109.A5
N$121
  Top 0.1: U$109.A4 18.7,6.51 18.39,6.82 18.39,7.59 U$124.P$1
N$122
  Top 0.1: U$125.P$1 17.76,7.04 18.2,6.6 U$109.A3
N$123
  Top 0.1: U$109.A39 U$109.A40 26.6,2.14 26.6,3.57 27.34,4.3 27.34,7.32 26.6,8.05 U$126.P$1
N$124
  Top 0.1: U$109.A38 25.7,2.95 27.14,4.38 27.14,6.44 26.6,6.98 U$127.P$1
N$125
  Top 0.1: U$128.P$1 26.6,9.08 27.54,8.14 27.54,1.84 26.89,1.19 25.36,1.19 25.2,1.35 U$109.A37
N$126
  Top 0.1: U$109.A36 24.7,1.5 25.21,0.99 26.97,0.99 27.73,1.75 27.73,9.02 26.98,9.77 26.63,9.77 U$129.P$1
N$127
  Top 0.1: U$109.A35 24.2,1.5 24.91,0.79 27.05,0.79 27.93,1.67 27.93,9.56 U$130.P$1
N$128  (via drill 0.2)
  Top 0.1: v24.4,3.9 24.4,3.8 23.7,3.1 U$109.A34
  Bottom 0.1: v24.4,3.9 25,4.5 25,8.94 U$131.P$1
N$129  (via drill 0.2)
  Top 0.1: v23.7,3.9 23.2,3.4 U$109.A33
  Bottom 0.1: v23.7,3.9 23.7,6.76 23.75,6.82 23.75,8.45 24.11,8.81 U$132.P$1
N$130  (via drill 0.2)
  Top 0.1: v23,3.9 22.7,3.6 U$109.A32
  Bottom 0.1: U$133.P$1 23,9.17 23,8.79 22.81,8.61 22.81,6.82 23,6.63 v23,3.9
N$131  (via drill 0.2)
  Top 0.1: v22.3,3.9 22.3,3.05 22.2,2.95 U$109.A31
  Bottom 0.1: v22.3,3.9 22.3,6.23 21.71,6.82 21.71,7.39 21.7,7.4 21.7,9.22 U$134.P$1
N$132  (via drill 0.2)
  Top 0.1: v21.6,3.9 21.7,3.8 U$109.A30
  Bottom 0.1: U$135.P$1 20.6,9.08 20.6,6.82 21.05,6.37 21.05,4.45 v21.6,3.9
N$133  (via drill 0.2 pad 0.55)
  Top 0.1: v20.89,3.89 21.2,3.58 U$109.A29
  Bottom 0.1: v20.89,3.89 19.45,5.33 19.45,8.99 U$136.P$1
N$134  (via drill 0.2 pad 0.55)
  Top 0.1: v20.2,3.9 20.7,3.4 U$109.A28
  Bottom 0.1: v20.2,3.9 20.2,4.3 18.39,6.11 18.39,8.8 U$137.P$1
N$135
  Top 0.1: U$138.P$1 16.05,8.76 15.73,8.44 15.73,1.91 16.85,0.79 20.14,0.79 20.2,0.85 U$109.A27
N$136
  Top 0.1: U$139.P$1 16.65,9.08 15.93,8.36 15.93,1.99 16.93,0.99 19.69,0.99 19.7,1 U$109.A26
N$137
  Top 0.1: U$109.A25 19.2,1.29 19.1,1.19 17.01,1.19 16.13,2.07 16.13,5.81 17.15,6.83 U$140.P$1
N$138  (via drill 0.2)
  Top 0.1: U$109.A24 v18.7,4.1
  Bottom 0.1: U$141.P$1 16.65,8.05 17.12,7.58 17.12,5.68 v18.7,4.1
N$139  (via drill 0.2)
  Top 0.1: U$109.A23 v18.2,3.6
  Bottom 0.1: v18.2,3.6 16.65,5.15 U$142.P$1
N$140
  Top 0.15: U$144.P$1 17.2,3.75 U$109.A1

## Text on the board
tPlace: REF | REF | G | G | GND | EIB VPM POm BC | GND | EIB VPM POm BC | REF | REF | G | G | EIB VPM POm BC | EIB VPM POm BC | GND | GND
tNames: MC-Av1 | MC-Av1 | MC-Av1 | MC-Av1